# Altium PCB 拼版.PcbDoc (part 1 of 3)
Units mm, origin at the board's own origin, x right, y up, seen from the top; angles counter-clockwise.
Board outline 152.4 x 101.6 mm, 4 copper layers (Top Layer, Mid-Layer 1, Mid-Layer 2, Bottom Layer); 303 components, 0 nets, 1078 pads, 478 vias.
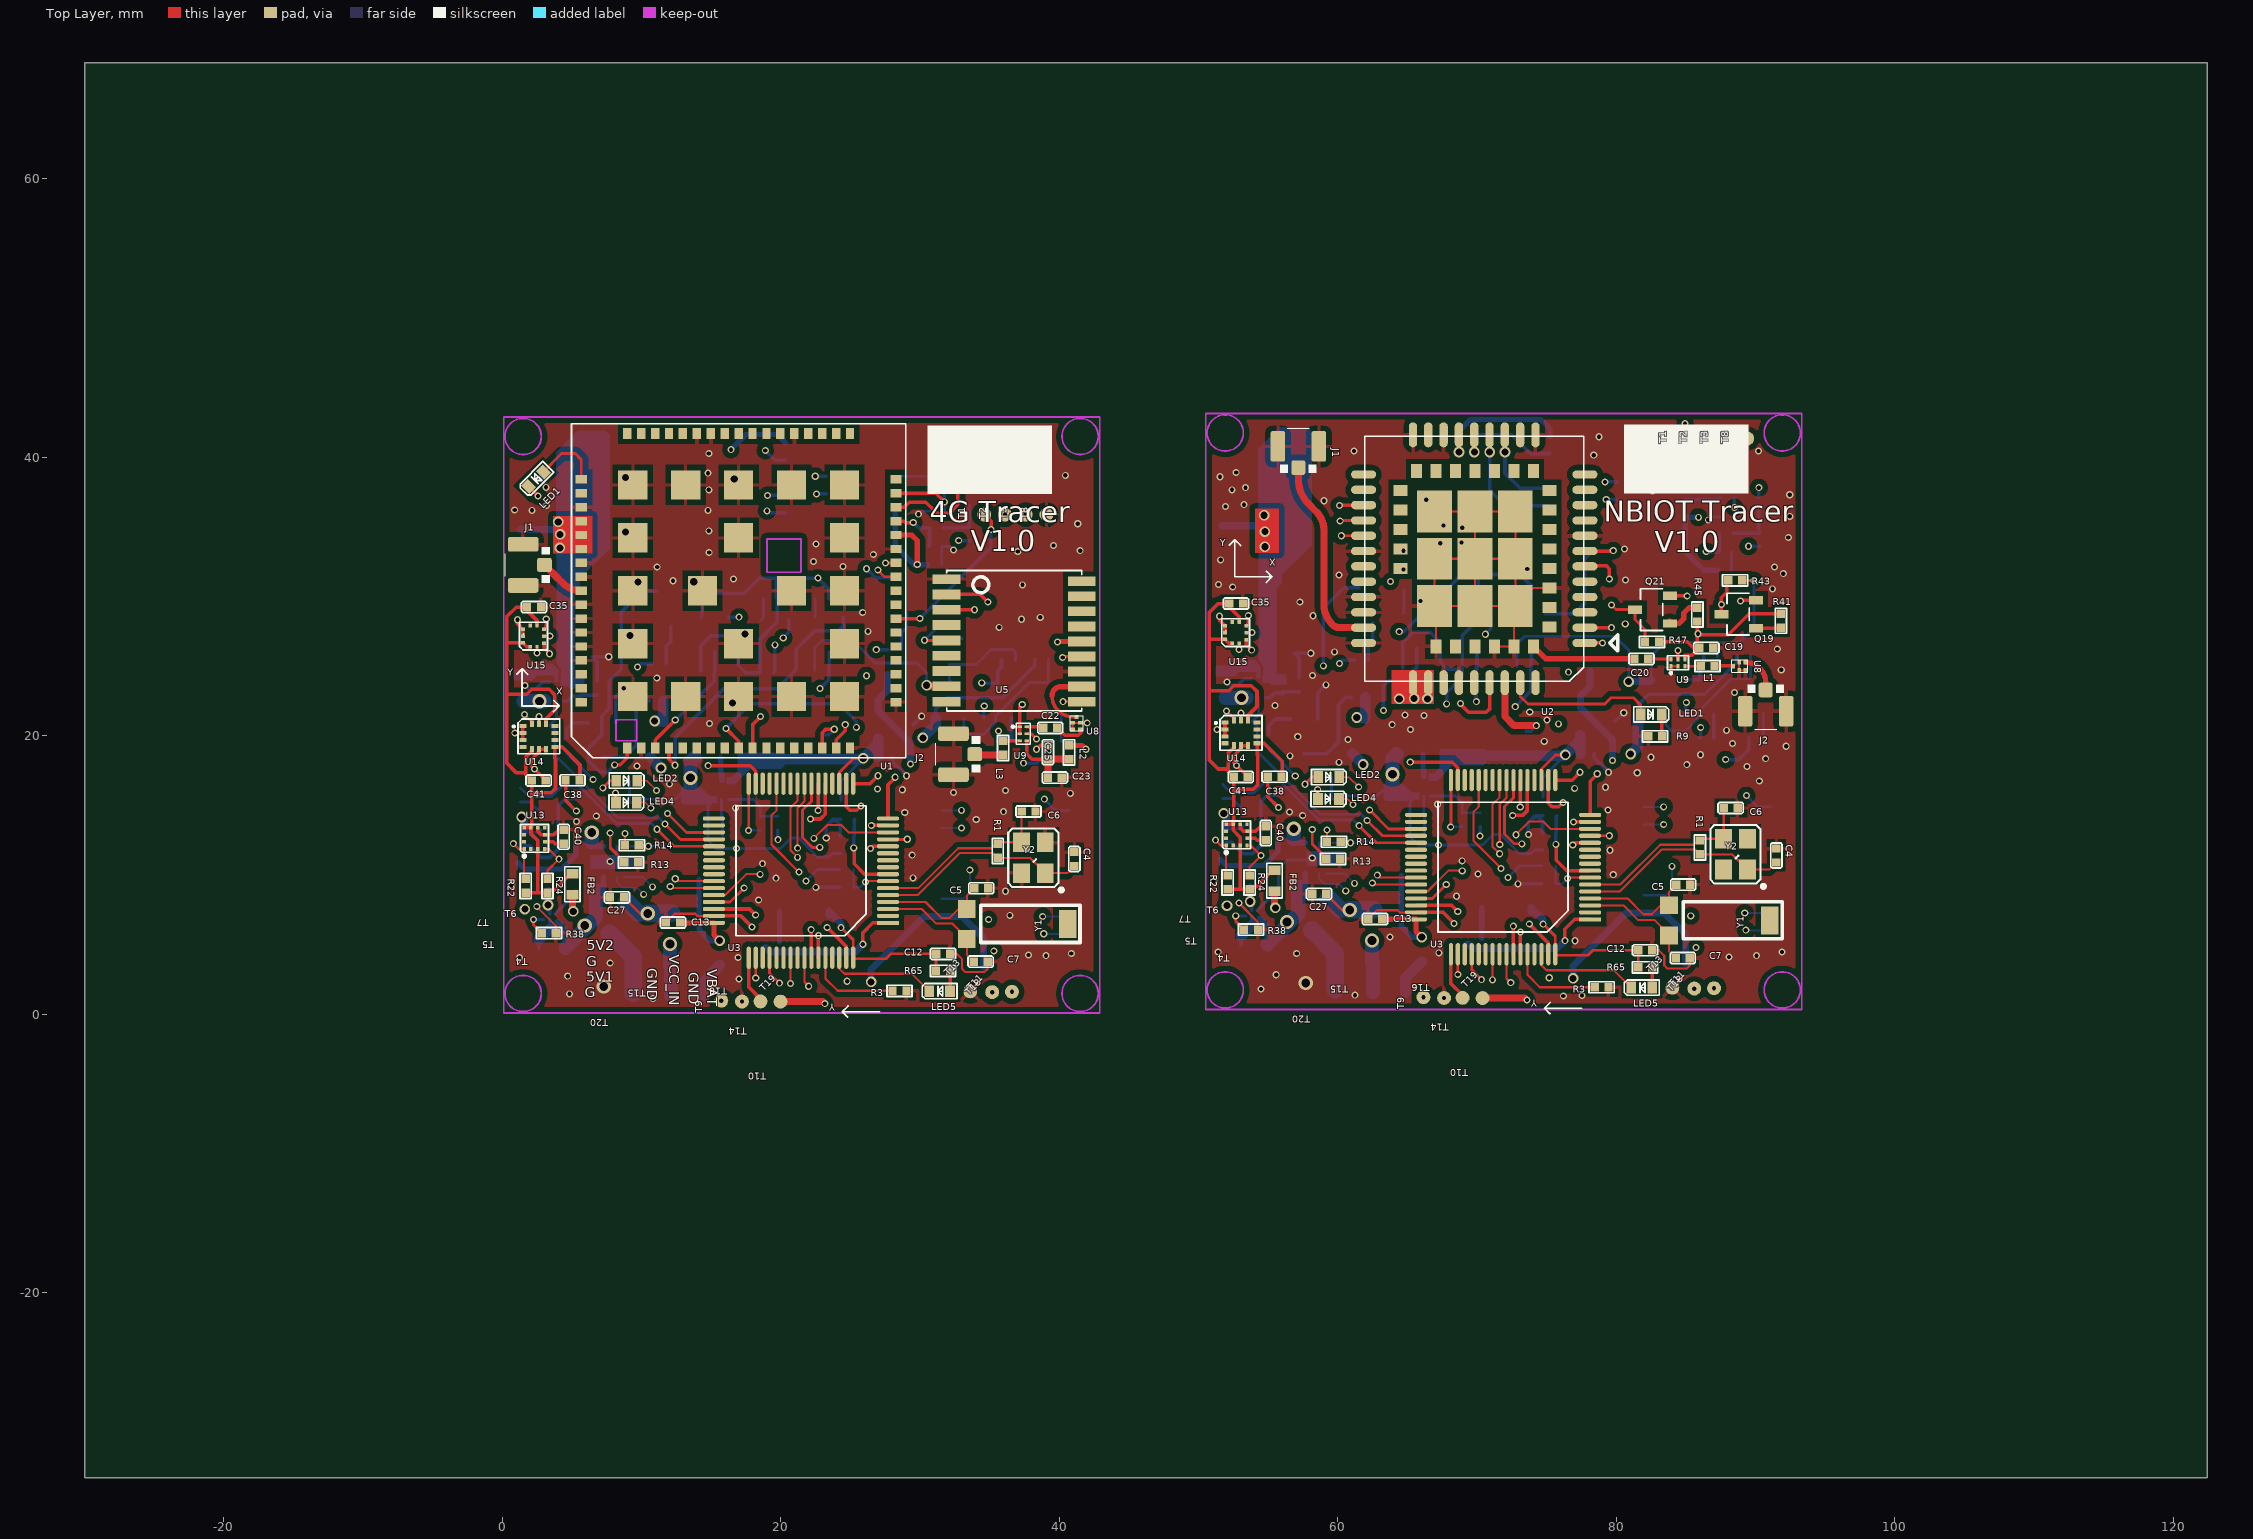
[diagram p0: Top Layer view]
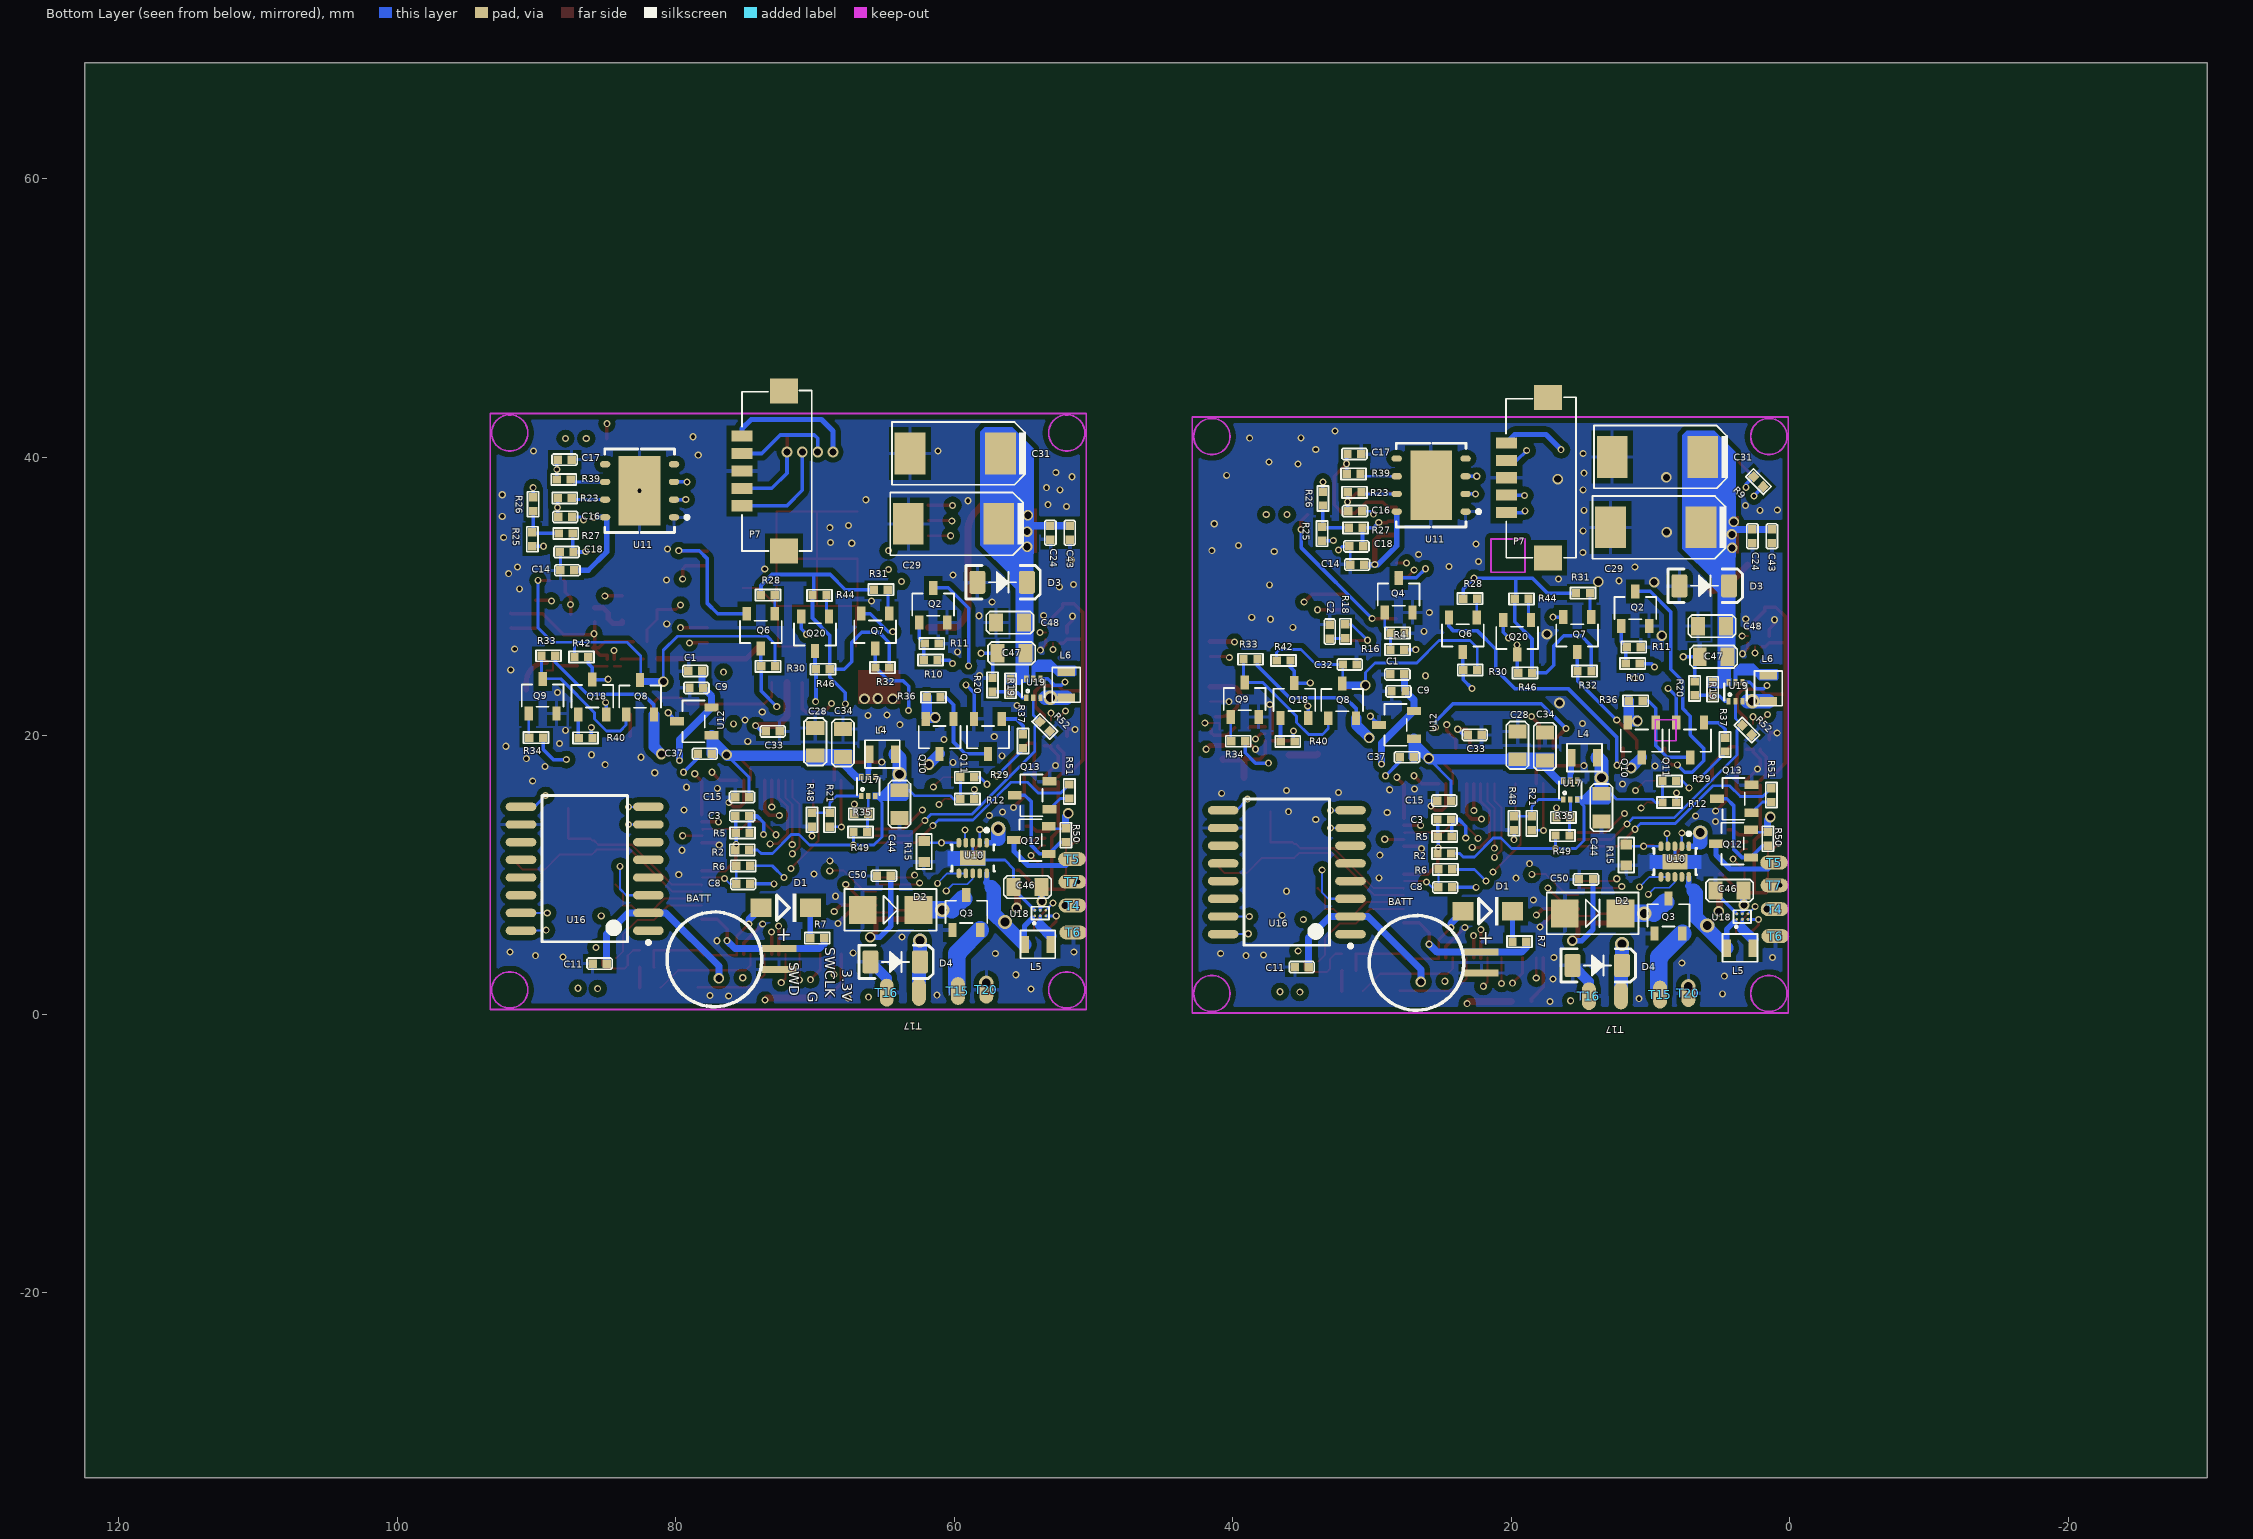
[diagram p1: Bottom Layer view, seen from below]
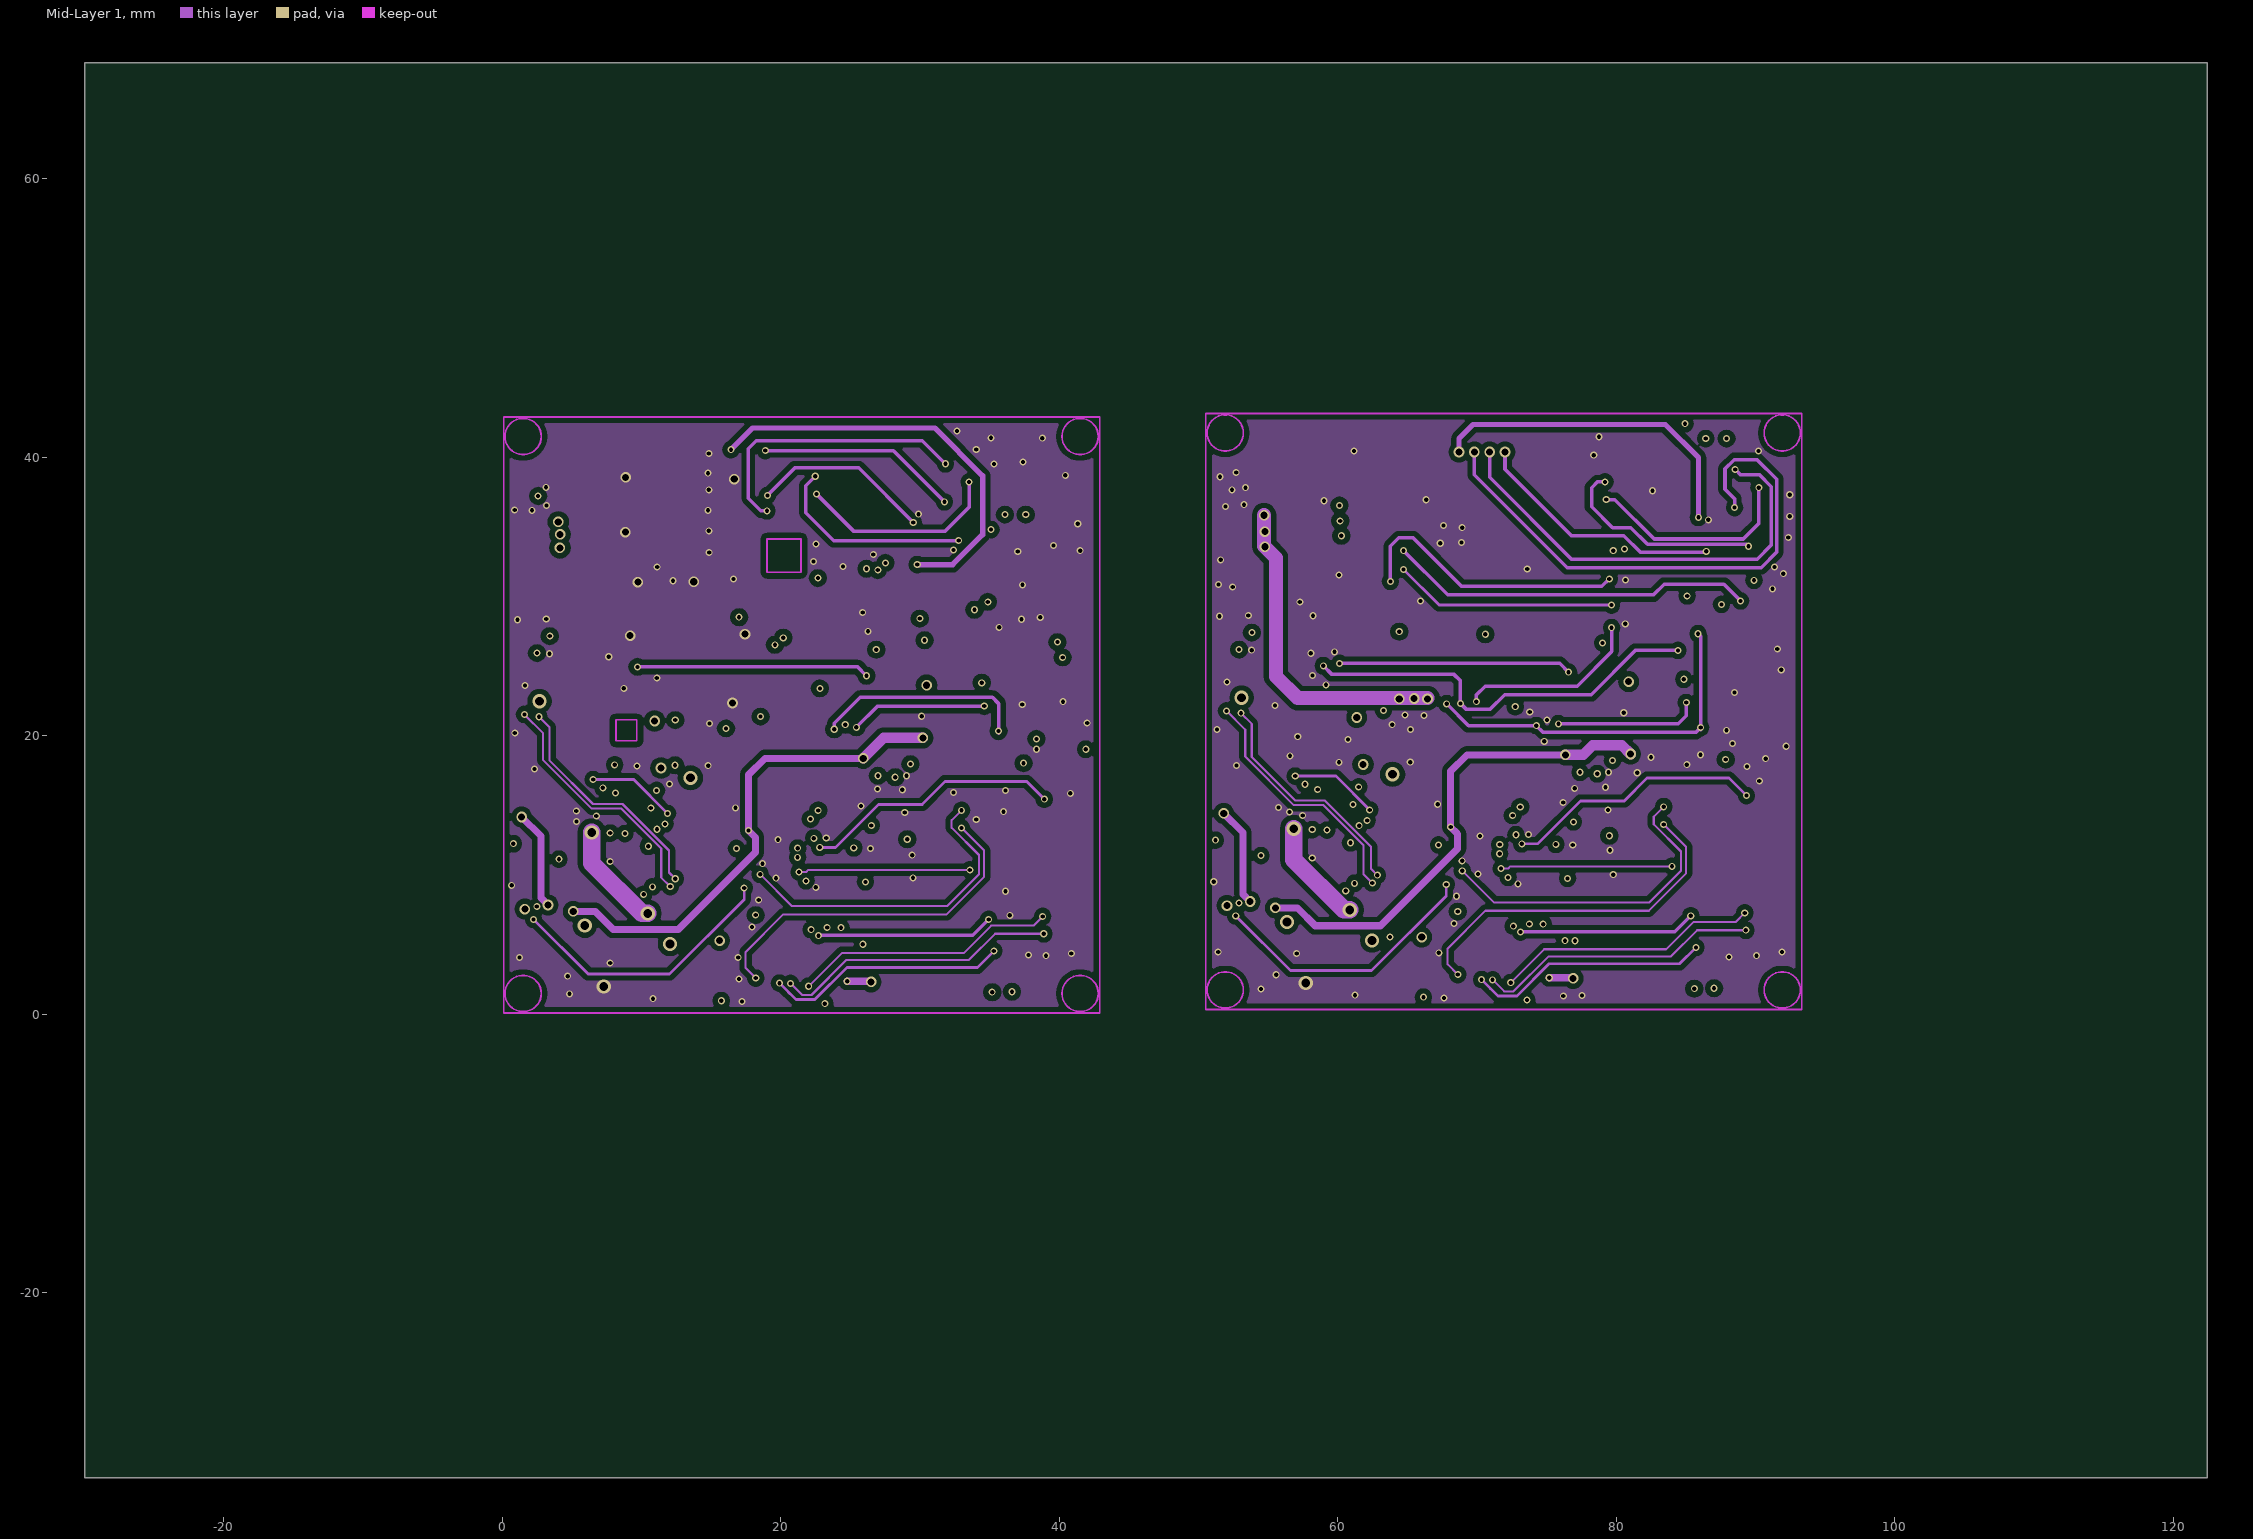
[diagram p2: Mid-Layer 1]
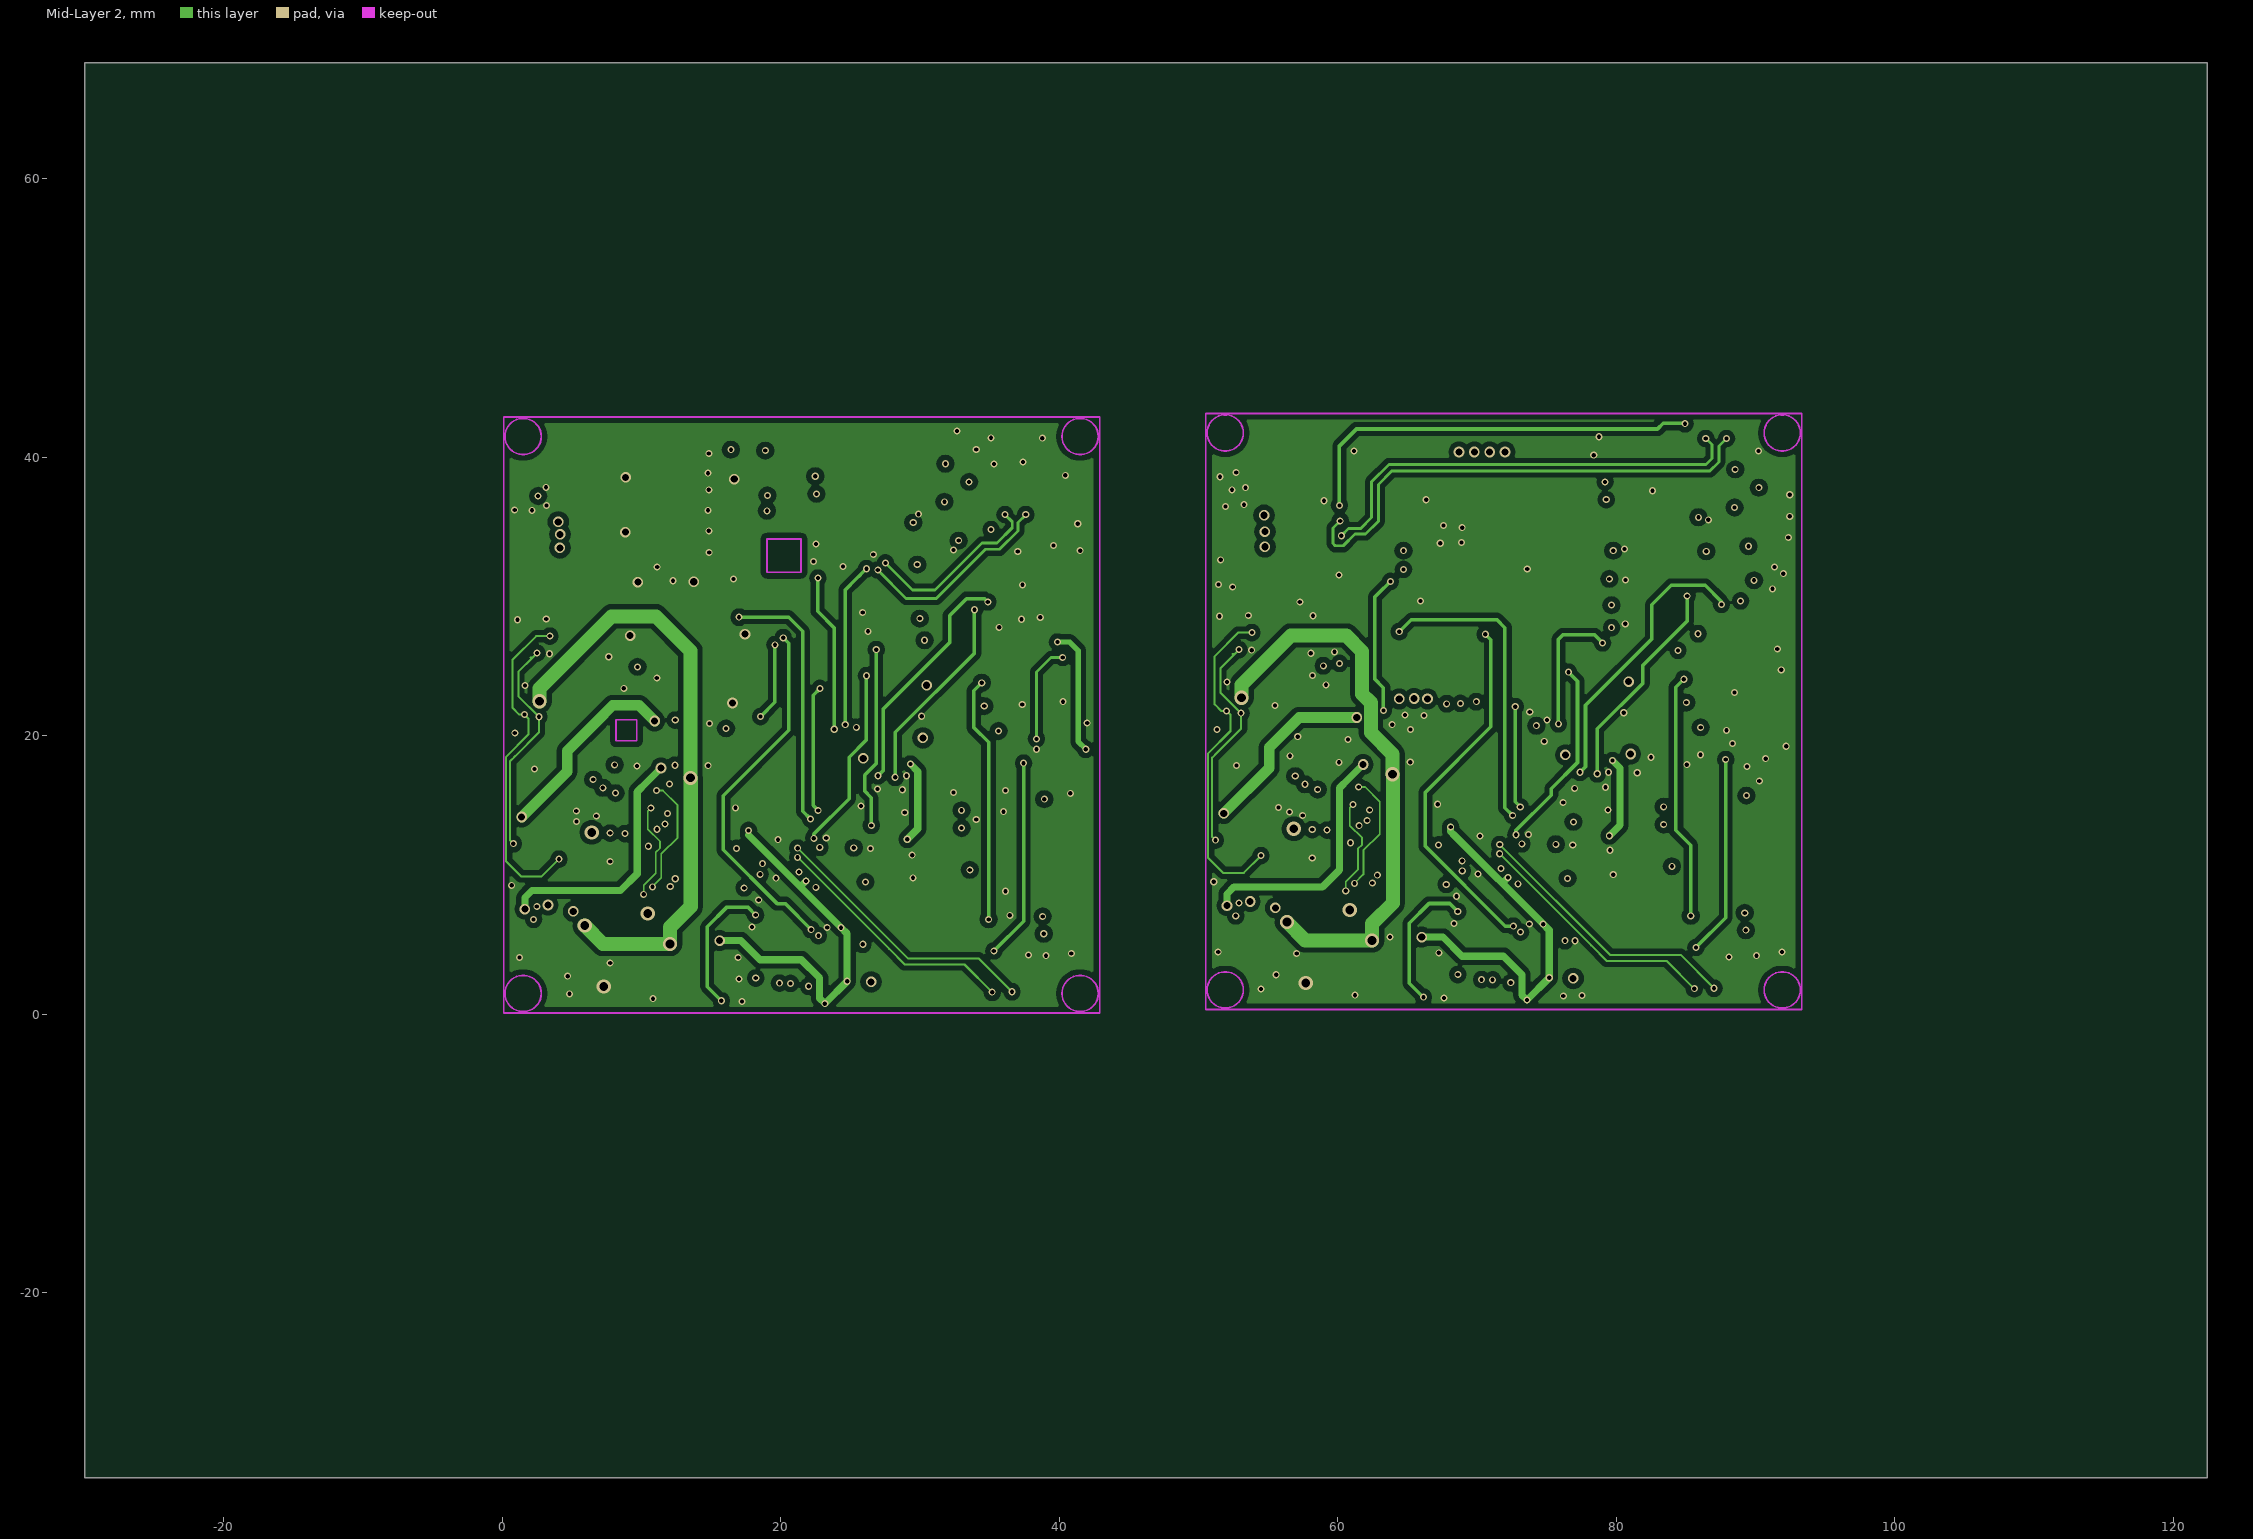
[diagram p3: Mid-Layer 2]

## Layer stack, top to bottom
Top Layer: signal copper 0.0356
Dielectric: core 0.32, FR-4, Dk 4.8
Mid-Layer 1: signal copper 0.0356
Dielectric: prepreg 0.32, FR-4, Dk 4.8
Mid-Layer 2: signal copper 0.0356
Dielectric: core 0.32, FR-4, Dk 4.8
Bottom Layer: signal copper 0.0356

## Board outline
-29.972,-33.274 122.428,-33.274 122.428,68.326 -29.972,68.326

## Design rules (kind name [scope] priority, off if disabled: settings)
Clearance [All] p1: gap=0.254
PolygonConnect [All] p1: connectstyle=Relief reliefconductorwidth=0.254 reliefentries=4 polygonreliefangle="90 Angle"
RoutingVias [All] p1: holewidth=0.711 width=1.27 viastyle="Through Hole" minholewidth=0.711 minwidth=1.27 maxholewidth=0.711 maxwidth=1.27
SilkscreenOverComponentPads [All] p1: minsilkscreentomaskgap=0.254
SolderMaskExpansion [All] p1: expansion=0.102
Width [All] p1: maxlimit=0.254 minlimit=0.254 preferedwidth=0.254
27 further rules are at their usual default settings.

## Components (designator, comment, footprint, x,y, rotation, side; value= is the part's Value field where it differs from the comment)
BATT "MS621FE" MS621FE 72.568,3.968 r180 bottom
BATT "MS621FE" MS621FE 22.149,3.714 r180 bottom
C1 "0.1uF/25V" 0402c 78.098,24.671 r0 bottom
C1 "0.1uF/25V" 0402c 27.679,24.417 r0 bottom
C2 "4.7uF/10V" 0402c 33.033,27.986 r270 bottom
C3 "0.1uF/25v" 0402c 75.718,14.248 r180 bottom
C3 "0.1uF/25v" 0402c 25.299,13.994 r180 bottom
C4 "22pF" 0402c 91.498,11.91 r270 top
C4 "22pF" 0402c 41.079,11.656 r270 top
C5 "6pF" 0402c 84.313,9.313 r0 top
C5 "6pF" 0402c 33.894,9.059 r0 top
C6 "22pF" 0402c 88.714,14.82 r180 top
C6 "22pF" 0402c 38.295,14.566 r180 top
C7 "6pF" 0402c 84.272,4.037 r0 top
C7 "6pF" 0402c 33.853,3.783 r0 top
C8 "0.1uF/25V" 0402C 74.654,9.374 r0 bottom
C8 "0.1uF/25V" 0402C 24.235,9.12 r0 bottom
C9 "0.1uF/25V" 0402C 79.014,23.449 r180 bottom
C9 "0.1uF/25V" 0402C 28.595,23.195 r180 bottom
C11 "0.1uF/25V" 0402C 85.963,3.64 r180 bottom
C11 "0.1uF/25V" 0402C 35.544,3.386 r180 bottom
C12 "0.1uF/25V" 0402C 82.573,4.602 r180 top
C12 "0.1uF/25V" 0402C 32.154,4.348 r180 top
C13 "0.1uF/25V" 0402C 62.179,6.847 r0 top
C13 "0.1uF/25V" 0402C 11.76,6.593 r0 top
C14 "0.1uF" 0402C 88.28,31.89 r180 bottom
C14 "0.1uF" 0402C 31.562,32.297 r180 bottom
C15 "0.1uF/25V" 0402C 75.733,15.602 r180 bottom
C15 "0.1uF/25V" 0402C 25.314,15.348 r180 bottom
C16 "10pF/NC" 0402C 87.433,35.726 r0 bottom
C16 "10pF/NC" 0402C 30.714,36.133 r0 bottom
C17 "10pF/NC" 0402C 87.476,39.838 r0 bottom
C17 "10pF/NC" 0402C 30.758,40.244 r0 bottom
C18 "10pF/NC" 0402C 88.341,33.202 r180 bottom
C18 "10pF/NC" 0402C 31.622,33.608 r180 bottom
C19 "0.1uF" 0402C 86.97,26.314 r180 top
C20 "36pF" 0402c 81.305,25.527 r0 top
C22 "36pF" 0402c 39.85,20.573 r180 top
C23 "4.7uF" 0402c 40.182,16.998 r180 top
C24 "10pF" 0402C 53.099,34.087 r90 bottom
C24 "10pF" 0402C 2.68,33.833 r90 bottom
C25 "0.1uF" 0402C 39.187,19.327 r270 top
C27 "1uF/25V" 0402C 59.16,8.655 r180 top
C27 "1uF/25V" 0402C 8.741,8.401 r180 top
C28 "22uF/10V" 0805C 69.98,18.575 r90 bottom
C28 "22uF/10V" 0805C 19.561,18.321 r90 bottom
C29 "1000uF" 7343 56.79,35.226 r0 bottom
C29 "1000uF" 7343 6.371,34.972 r0 bottom
C31 "1000uF" 7343 56.673,40.282 r0 bottom
C31 "1000uF" 7343 6.254,40.028 r0 bottom
C32 "10uF/10V" 0402C 31.096,25.125 r0 bottom
C33 "0.1uF/25V" 0402C 72.536,20.326 r0 bottom
C33 "0.1uF" 0402C 22.117,20.072 r0 bottom
C34 "22uF/10V" 0805C 67.996,18.492 r90 bottom
C34 "22uF/10V" 0805C 17.577,18.238 r90 bottom
C35 "0.1uF/25V" 0402C 53.197,29.5 r180 top
C35 "0.1uF/25V" 0402C 2.778,29.246 r180 top
C37 "0.1uF/25V" 0402c 77.415,18.716 r0 bottom
C37 "0.1uF/25V" 0402c 26.996,18.462 r0 bottom
C38 "0.1uF/25V" 0402C 54.963,17.065 r0 top
C38 "0.1uF/25V" 0402C 4.544,16.811 r0 top
C40 "22pF" 0402c 54.83,12.513 r90 top
C40 "22pF" 0402c 4.411,12.259 r90 top
C41 "0.1uF/25V" 0402C 53.532,17.051 r180 top
C41 "0.1uF/25V" 0402C 3.113,16.797 r180 top
C43 "33pF" 0402C 51.702,34.087 r90 bottom
C43 "33pF" 0402C 1.283,33.833 r90 bottom
C44 "22uF/10V" 0805C 63.939,16.095 r270 bottom
C44 "22uF/10V" 0805C 13.52,15.841 r270 bottom
C46 "22uF/10V" 0805C 53.736,9.145 r0 bottom
C46 "22uF/10V" 0805C 3.317,8.891 r0 bottom
C47 "22uF/10V" 0805C 54.881,25.933 r0 bottom
C47 "22uF/10V" 0805C 4.462,25.679 r0 bottom
C48 "22uF/10V" 0805C 54.999,28.128 r0 bottom
C48 "22uF/10V" 0805C 4.58,27.874 r0 bottom
C50 "0.1uF/25V" 0402C 65.548,9.951 r180 bottom
C50 "0.1uF/25V" 0402C 15.129,9.697 r180 bottom
D1 "1N4148" DIODE_SOP 73.887,7.658 r180 bottom
D1 "1N4148" DIODE_SOP 23.468,7.404 r180 bottom
D2 "SMAJ12CA" SMA 66.572,7.505 r180 bottom
D2 "SMAJ12CA" SMA 16.153,7.251 r180 bottom
D3 "DIODE_SCHOTTKY_0" LL-34(D1206) 56.561,31.028 r180 bottom
D3 "DIODE_SCHOTTKY_0" LL-34(D1206) 6.142,30.774 r180 bottom
D4 "DIODE_SCHOTTKY_0" LL-34(D1206) 64.244,3.767 r180 bottom
D4 "DIODE_SCHOTTKY_0" LL-34(D1206) 13.825,3.513 r180 bottom
FB2 "10R/1A" 0603R 55.456,8.848 r90 top
FB2 "10R/1A" 0603R 5.037,8.594 r90 top
J1 "IPEX" RF-UFL 57.167,40.787 r0 top
J1 "IPEX" RF-UFL 1.504,32.275 r90 top
J2 "IPEX" RF-UFL 90.729,21.768 r180 top
J2 "IPEX" RF-UFL 32.399,18.682 r90 top
L1 "LQW15A" 0402R 86.055,25.019 r0 top
L2 "27nH" 0402R 40.706,19.313 r270 top
L3 "LQW15A" 0402R 35.966,19.634 r270 top
L4 "SRP4020TA-1R0M" L2520 66.119,18.676 r180 bottom
L4 "SRP4020TA-1R0M" L2520 15.7,18.422 r180 bottom
L5 "SRP4020TA-2R2M" L2520 54.951,5.016 r180 bottom
L5 "SRP4020TA-2R2M" L2520 4.532,4.762 r180 bottom
L6 "SRP4020TA-1R0M" L2520 51.963,24.627 r270 bottom
L6 "SRP4020TA-1R0M" L2520 1.544,24.373 r270 bottom
LED1 "LED" 0603LED 81.763,21.539 r0 top
LED1 "LED" 0603LED 2.953,38.964 r225 top
LED2 "LED" 0603LED 58.606,17.035 r0 top
LED2 "LED" 0603LED 8.187,16.781 r0 top
LED4 "LED" 0603LED 58.583,15.465 r0 top
LED4 "LED" 0603LED 8.164,15.211 r0 top
LED5 "LED" 0603LED 82.58,1.918 r180 top
LED5 "LED" 0603LED 32.161,1.664 r180 top
P7 "Header 5" 5×1.25mmSMT 75.235,36.525 r90 bottom
P7 "Header 5" 5×1.25mmSMT 20.353,36.034 r90 bottom
Q2 "MMBT3904" SOT23-3 62.509,28.13 r270 bottom
Q2 "MMBT3904" SOT23-3 12.09,27.876 r270 bottom
Q3 "Si2369DS" sot23-3 60.126,6.064 r270 bottom
Q3 "Si2369DS" sot23-3 9.707,5.81 r270 bottom
Q4 "MMBT3904" SOT23-3 29.088,28.845 r270 bottom
Q6 "MMBT3904" SOT23-3 72.893,28.768 r90 bottom
Q6 "MMBT3904" SOT23-3 22.474,28.514 r90 bottom
Q7 "MMBT3904" SOT23-3 64.678,28.775 r90 bottom
Q7 "MMBT3904" SOT23-3 14.259,28.521 r90 bottom
Q8 "Si2369DS" sot23-3 83.562,21.52 r270 bottom
Q8 "Si2369DS" sot23-3 33.143,21.266 r270 bottom
Q9 "S8050" SOT23-3 90.56,21.596 r270 bottom
Q9 "S8050" SOT23-3 40.141,21.342 r270 bottom
Q10 "Si2369DS" sot23-3 60.052,21.211 r90 bottom
Q10 "Si2369DS" sot23-3 9.633,20.957 r90 bottom
Q11 "S8050" SOT23-3 56.575,21.211 r90 bottom
Q11 "S8050" SOT23-3 6.156,20.957 r90 bottom
Q12 "Si2369DS" sot23-3 53.213,11.517 r180 bottom
Q12 "Si2369DS" sot23-3 2.794,11.263 r180 bottom
Q13 "S8050" SOT23-3 53.155,14.733 r180 bottom
Q13 "S8050" SOT23-3 2.736,14.479 r180 bottom
Q18 "MMBT3904" SOT23-3 86.988,21.544 r270 bottom
Q18 "MMBT3904" SOT23-3 36.569,21.29 r270 bottom
Q19 "MMBT3904" SOT23-3 90.043,27.737 r0 top
Q20 "MMBT3904" SOT23-3 68.997,28.585 r90 bottom
Q20 "MMBT3904" SOT23-3 18.578,28.331 r90 bottom
Q21 "MMBT3904" SOT23-3 83.845,28.067 r0 top
R1 "1MR" 0402R 86.004,11.489 r90 top
R1 "1MR" 0402R 35.585,11.235 r90 top
R2 "10K/1%" 0402R 74.718,11.81 r0 bottom
R2 "10K/1%" 0402R 24.299,11.556 r0 bottom
R3 "100K" 0402R 78.446,1.945 r0 top
R3 "100K" 0402R 28.027,1.691 r0 top
R4 "47K" 0402R 28.662,27.4 r180 bottom
R5 "10K/1%" 0402R 75.702,13.029 r180 bottom
R5 "10K/1%" 0402R 25.283,12.775 r180 bottom
R6 "10K" 0402R 74.647,10.667 r0 bottom
R6 "10K" 0402R 24.228,10.413 r0 bottom
R7 "470" 0402R 70.331,5.474 r180 bottom
R7 "470" 0402R 19.912,5.22 r180 bottom
R9 "1K" 0402R 83.287,19.964 r180 top
R9 "1K" 0402R 1.893,37.903 r45 bottom
R10 "4.7K" 0402R 62.201,25.445 r180 bottom
R10 "4.7K" 0402R 11.782,25.191 r180 bottom
R11 "47K" 0402R 62.116,26.628 r180 bottom
R11 "47K" 0402R 11.697,26.374 r180 bottom
R12 "1K/1%" 0402R 59.558,15.465 r180 bottom
R12 "1K/1%" 0402R 9.139,15.211 r180 bottom
R13 "3.95K/1%" 0402R 59.167,11.166 r0 top
R13 "3.95K/1%" 0402R 8.748,10.912 r0 top
R14 "21.5k/1%" 0402R 60.224,12.398 r180 top
R14 "21.5k/1%" 0402R 9.805,12.144 r180 top
R15 "RTH103AT" 0603R 62.156,10.948 r90 bottom
R15 "RTH103AT" 0603R 11.737,10.694 r90 bottom
R16 "4.7K" 0402R 28.674,26.189 r180 bottom
R18 "10K" 0402R 31.914,28.004 r270 bottom
R19 "534K/1%" 0402R 55.959,24.097 r270 bottom
R19 "534K/1%" 0402R 5.54,23.843 r270 bottom
R20 "100K/1%" 0402R 57.248,24.16 r270 bottom
R20 "100K/1%" 0402R 6.829,23.906 r270 bottom
R21 "400K/1%" 0402R 68.943,13.469 r90 bottom
R21 "400K/1%" 0402R 18.524,13.215 r90 bottom
R22 "4.7K" 0402R 52.095,8.974 r90 top
R22 "4.7K" 0402R 1.676,8.72 r90 top
R23 "10R" 0402R 88.471,37.077 r180 bottom
R23 "10R" 0402R 31.752,37.483 r180 bottom
R24 "4.7K" 0402R 53.67,9.974 r270 top
R24 "4.7K" 0402R 3.251,9.72 r270 top
R25 "0R" 0402R 90.299,33.617 r90 bottom
R25 "0R" 0402R 33.58,34.023 r90 bottom
R26 "0R" 0402R 90.238,37.132 r270 bottom
R26 "0R" 0402R 33.52,37.538 r270 bottom
R27 "10R" 0402R 87.398,34.533 r0 bottom
R27 "10R" 0402R 30.68,34.94 r0 bottom
R28 "4.7K" 0402R 72.876,30.109 r0 bottom
R28 "4.7K" 0402R 22.457,29.855 r0 bottom
R29 "1K/1%" 0402R 59.558,17.015 r180 bottom
R29 "1K/1%" 0402R 9.139,16.761 r180 bottom
R30 "10K" 0402R 73.865,24.986 r180 bottom
R30 "10K" 0402R 23.446,24.732 r180 bottom
R31 "4.7K" 0402R 64.763,30.504 r0 bottom
R31 "4.7K" 0402R 14.344,30.25 r0 bottom
R32 "4.7K" 0402R 65.657,24.904 r180 bottom
R32 "4.7K" 0402R 15.238,24.65 r180 bottom
R33 "4K7" 0402R 88.642,25.753 r0 bottom
R33 "4K7" 0402R 38.223,25.499 r0 bottom
R34 "4K7" 0402R 90.528,19.868 r180 bottom
R34 "4K7" 0402R 40.109,19.614 r180 bottom
R35 "10K/1%" 0402R 67.173,14.402 r180 bottom
R35 "10K/1%" 0402R 16.754,14.148 r180 bottom
R36 "4K7" 0402R 61.983,22.775 r180 bottom
R36 "4K7" 0402R 11.564,22.521 r180 bottom
R37 "4K7" 0402R 55.056,20.127 r270 bottom
R37 "4K7" 0402R 4.637,19.873 r270 bottom
R38 "10K/1%" 0402R 54.27,6.083 r180 top
R38 "10K/1%" 0402R 3.851,5.829 r180 top
R39 "10R" 0402R 88.54,38.41 r180 bottom
R39 "10R" 0402R 31.822,38.817 r180 bottom
R40 "4.7K" 0402R 86.972,19.851 r180 bottom
R40 "4.7K" 0402R 36.553,19.597 r180 bottom
R41 "4.7K" 0402R 91.821,27.762 r90 top
R42 "10K" 0402R 86.27,25.665 r0 bottom
R42 "10K" 0402R 35.851,25.411 r0 bottom
R43 "10K" 0402R 88.036,31.166 r0 top
R44 "4.7K" 0402R 69.176,30.09 r0 bottom
R44 "4.7K" 0402R 18.757,29.836 r0 bottom
R45 "4.7K" 0402R 85.827,29.21 r270 top
R46 "4.7K" 0402R 69.927,24.782 r180 bottom
R46 "4.7K" 0402R 19.508,24.528 r180 bottom
R47 "4.7K" 0402R 82.067,26.746 r0 top
R48 "100K/1%" 0402R 70.218,13.48 r90 bottom
R48 "100K/1%" 0402R 19.799,13.226 r90 bottom
R49 "13K/1%" 0402R 67.236,13.093 r180 bottom
R49 "13K/1%" 0402R 16.817,12.839 r180 bottom
R50 "4K7" 0402R 51.987,13.361 r270 bottom
R50 "4K7" 0402R 1.568,13.107 r270 bottom
R51 "4K7" 0402R 51.736,15.503 r90 bottom
R51 "4K7" 0402R 1.317,15.249 r90 bottom
R52 "10K/1%" 0402R 53.135,20.318 r45 bottom
R52 "10K/1%" 0402R 2.716,20.064 r45 bottom
R65 "1K" 0402R 82.571,3.376 r180 top
R65 "1K" 0402R 32.152,3.122 r180 top
T1 "TPD" TPD 84.938,41.351 r90 top
T1 "TPD" TPD 34.61,35.891 r90 top
T2 "TPD" TPD 86.428,41.351 r90 top
T2 "TPD" TPD 36.1,35.891 r90 top
T3 "TPD" TPD 87.918,41.351 r90 top
T3 "TPD" TPD 37.59,35.891 r90 top
T4 "TPD" TP#1 51.504,7.808 r180 top
T4 "TPD" TP#1 1.085,7.554 r180 top
T5 "TPD" TP#1 51.538,11.151 r180 top
T5 "TPD" TP#1 1.119,10.897 r180 top
T6 "TPD" TP#1 51.45,5.878 r0 top
T6 "TPD" TP#1 1.031,5.624 r0 top
T7 "TPD" TP#1 51.515,9.521 r180 top
T7 "TPD" TP#1 1.096,9.267 r180 top
T8 "TPD" TPD 89.408,41.351 r90 top
T8 "TPD" TPD 39.08,35.891 r90 top
T9 "TPD" TPd 66.148,1.231 r90 top
T9 "TPD" TPd 15.729,0.977 r90 top
T10 "TPD" TPd 68.963,1.186 r270 top
T10 "TPD" TPd 18.544,0.932 r270 top
T11 "TPD" TPd 87.021,1.876 r135 top
T11 "TPD" TPd 36.602,1.622 r135 top
T13 "TPD" TPd 84.024,1.908 r135 top
T13 "TPD" TPd 33.605,1.654 r135 top
T14 "TPD" TPd 67.632,1.175 r270 top
T14 "TPD" TPd 17.213,0.921 r270 top
T15 "TPD" TP#1 59.731,1.675 r270 top
T15 "TPD" TP#1 9.312,1.421 r270 top
T16 "TPD" TP#1 64.844,1.558 r270 top
T16 "TPD" TP#1 14.425,1.304 r270 top
T17 "TPD" TP#2 62.539,1.609 r270 bottom
T17 "TPD" TP#2 12.12,1.355 r270 bottom
T18 "TPD" TPd 85.602,1.847 r135 top
T18 "TPD" TPd 35.183,1.593 r135 top
T19 "TPD" TPd 70.399,1.165 r135 top
T19 "TPD" TPd 19.98,0.911 r135 top
T20 "TPD" TP#1 57.696,1.78 r270 top
T20 "TPD" TP#1 7.277,1.526 r270 top
U1 "A7670" A7670 16.973,30.42 r90 top
U2 "SIM7080G" SIM868 77.749,26.67 r180 top
U3 "stm32l412r8t6" LQFP-64 78.12,6.821 r180 top
U3 "stm32l412r8t6" LQFP-64 27.701,6.567 r180 top
U5 "SIM868E/SIM68" SIM68MB 31.914,31.255 r0 top
U8 "SAFFB1G56KB0F0A" SAFFB1G56KB0F0A 88.392,24.994 r0 top
U8 "SAFFB1G56KB0F0A" SAFFB1G56KB0F0A 41.247,21.357 r270 top
U9 "AW5005DNR" AW5005 84.43,25.248 r90 top
U9 "AW5005DNR" AW5005 37.413,20.148 r0 top
U10 "bq24210" QFN50P200X300X80-10N 58.669,11.223 r270 bottom
U10 "bq24210" QFN50P200X300X80-10N 8.25,10.969 r270 bottom
U11 "SLI76CF3600P" QFN127P500X600X80-8N 82.596,37.599 r0 bottom
U11 "SLI76CF3600P" QFN127P500X600X80-8N 25.751,38.006 r0 bottom
U12 "REF3025AIDBZR" SOT23-3 77.415,20.037 r180 bottom
U12 "REF3025AIDBZR" SOT23-3 26.996,19.783 r180 bottom
U13 "LIS2MDL" LIS2MDL 52.731,12.887 r90 top
U13 "LIS2MDL" LIS2MDL 2.312,12.633 r90 top
U14 "LSM6DS3TR" LSM6DS3TR-C 53.052,20.213 r0 top
U14 "LSM6DS3TR" LSM6DS3TR-C 2.633,19.959 r0 top
U15 "BMP388" BMP388 52.664,27.418 r180 top
U15 "BMP388" BMP388 2.245,27.164 r180 top
U16 "MX25L51245GMI-10G" SOP127P1030X239-16N 86.535,10.459 r0 bottom
U16 "MX25L51245GMI-10G" SOP127P1030X239-16N 36.116,10.205 r0 bottom
U17 "TPS61023" SOT563-6 66.18,16.356 r180 bottom
U17 "TPS61023" SOT563-6 15.761,16.102 r180 bottom
U18 "TPS610997YFFR" TPS610997YFFR 53.821,7.274 r90 bottom
U18 "TPS610997YFFR" TPS610997YFFR 3.402,7.02 r90 bottom
U19 "TPS61023" SOT563-6 54.32,23.411 r180 bottom
U19 "TPS61023" SOT563-6 3.901,23.157 r180 bottom
Y1 "MC-146 32.768K/6pF" 32.768K 83.779,5.667 r90 top
Y1 "MC-146 32.768K/6pF" 32.768K 33.36,5.413 r90 top
Y2 "8MHz" OSCILLATOR-3.2X2.5 88.561,11.493 r90 top
Y2 "8MHz" OSCILLATOR-3.2X2.5 38.142,11.239 r90 top

## Footprints (in the part's own frame and the unit in brackets; to place one, negate y for a bottom-side part, rotate by r counter-clockwise, add the part's x,y. Pads: shape width x height; smd on the part's side, far side on the other; paste and mask are expansions set on the pad)
5×1.25mmSMT [mm]
  rect 1.8x2 smd: 0(-3.25,-3) 0(8.25,-3)
  rect 0.8x1.5 smd: 1(0,0) 2(1.25,0) 3(2.5,0) 4(3.75,0) 5(5,0)
  round 0.5 on Bottom Overlay: ""(-0.875,0.432)
  silkscreen extent -3.25,-5 8.28,0.02
32.768K [mm]
  rect 1.27x1.27 smd: 1(0,0) 2(2.159,0)
  rect 2x1.27 smd: 3(1.07,-7.239)
  silkscreen extent -0.25,-8.13 2.41,-1.02
0402c [mm]
  rect 0.6x0.6 smd: 1(0,0) 2(1,0)
  silkscreen extent -0.4,-0.4 1.4,0.4
0402C [mm]
  rect 0.6x0.6 smd: 1(0,0) 2(1,0)
  silkscreen extent -0.4,-0.4 1.4,0.4
0402R [mm]
  rect 0.6x0.6 smd: 1(0,0) 2(1,0)
  silkscreen extent -0.4,-0.4 1.4,0.4
0603LED [mm]
  rect 0.7x0.85 smd: 1(0,0) 2(1.5,0)
  silkscreen extent -0.5,-0.55 2,0.55
0603R [mm]
  rect 0.7x0.85 smd: 1(0,0) 2(1.5,0)
  silkscreen extent -0.5,-0.55 2,0.55
0805C [mm]
  rect 1x1.3 smd: 1(0,0) 2(2,0)
  silkscreen extent -0.7,-0.8 2.7,0.8
7343 [mm]
  rect 2.2x3 smd: 1(0,0) 2(6.5,0)
  silkscreen extent -1.75,-2.25 7.8,2.25
A7670 [mm]
  rect 0.8x0.6 smd: 1(-11.3,8) 2(-11.3,7) 3(-11.3,6) 4(-11.3,5) 5(-11.3,4) 6(-11.3,3) 7(-11.3,2) 8(-11.3,1) 9(-11.3,0) 10(-11.3,-1) 11(-11.3,-2) 12(-11.3,-3) 13(-11.3,-4) 14(-11.3,-5) 15(-11.3,-6) 16(-11.3,-7) 17(-11.3,-8) 35(11.3,-8) 36(11.3,-7) 37(11.3,-6) 38(11.3,-5) 39(11.3,-4) 40(11.3,-3) 41(11.3,-2) 42(11.3,-1) 43(11.3,0) 44(11.3,1) 45(11.3,2) 46(11.3,3) 47(11.3,4) 48(11.3,5) 49(11.303,6) 50(11.3,7) 51(11.3,8)
  rect 0.6x0.8 smd: 18(-8,-11.3) 19(-7,-11.3) 20(-6,-11.3) 21(-5,-11.3) 22(-4,-11.3) 23(-3,-11.3) 24(-2,-11.3) 25(-1,-11.3) 26(0,-11.3) 27(1,-11.3) 28(2,-11.3) 29(3,-11.3) 30(4,-11.3) 31(5,-11.3) 32(6,-11.3) 33(7,-11.3) 34(8,-11.3) 52(8,11.3) 53(7,11.3) 54(6,11.3) 55(5,11.3) 56(4,11.3) 57(3,11.3) 58(2,11.3) 59(1,11.3) 60(0,11.3) 61(-1,11.3) 62(-2,11.3) 63(-3,11.3) 64(-4,11.3) 65(-5,11.3) 66(-6,11.3) 67(-7,11.3) 68(-8,11.3)
  rect 2.1x2.1 smd: 69(-7.6,7.6) 70(-7.6,3.8) 71(-7.6,0) 72(-7.6,-3.8) 73(-7.6,-7.6) 74(-3.8,-7.6) 75(0,-7.6) 76(3.8,-7.6) 77(7.6,-7.6) 78(7.6,-3.8) 79(7.6,0) 80(7.6,3.8) 81(7.6,7.6) 82(3.8,7.6) 83(0,7.6) 84(-3.8,7.6) 85(-3.8,0) 86(0,-3.8) 87(3.8,0) 88(0,2.591)
  Keep-Out Layer lines w0.127: 1.321,-2.045 3.721,-2.045 ; 1.321,-2.07 1.321,-4.47 3.721,-4.47 3.721,-2.07 ; -10.77,8.814 -10.77,7.314 -9.27,7.314 -9.27,8.814 -10.77,8.814
  silkscreen extent -12,-12 12,12
AW5005 [mm]
  rect 0.35x0.2 smd: 1(-0.25,0.5) 2(-0.25,0) 3(-0.25,-0.5) 4(0.25,-0.5) 5(0.25,0) 6(0.25,0.5)
  silkscreen extent -0.77,-0.75 0.5,0.75
BMP388 [mm]
  rect 0.25x0.275 smd: 1(0.25,0.763) 2(-0.25,0.763) 6(-0.25,-0.763) 7(0.25,-0.763)
  rect 0.275x0.25 smd: 3(-0.762,0.5) 4(-0.762,0) 5(-0.762,-0.5) 8(0.763,-0.5) 9(0.763,0) 10(0.763,0.483)
  silkscreen extent -1,-1 1,1
DIODE_SOP [mm]
  rect 1.5x1.3 smd: 1(0,0) 2(3.556,0)
  silkscreen extent 1.14,-1.02 2.56,1.02
L2520 [mm]
  rect 0.65x1.25 smd: 1(0,0) 2(1.9,0)
  silkscreen extent -0.29,-0.99 2.21,1.01
LIS2MDL [mm]
  rect 0.275x0.25 smd: 1(-0.763,0.75) 2(-0.763,0.25) 3(-0.763,-0.25) 4(-0.763,-0.75) 7(0.763,-0.75) 8(0.763,-0.25) 9(0.763,0.25) 10(0.763,0.75)
  rect 0.25x0.275 smd: 5(-0.25,-0.763) 6(0.25,-0.763) 11(0.25,0.762) 12(-0.25,0.762)
  silkscreen extent -1.35,-1 1,1
LL-34(D1206) [mil]
  rrect25% 45x65 smd: 1(-70,0) 2(70,0)
  silkscreen extent -102,-47 108,47, body extent -70,-28 68,30, height 56
LQFP-64 [mm]
  rect 1.6x0.3 smd: 1(0,0)
  oval 1.6x0.3 smd: 2(0,-0.5) 3(0,-1) 4(0,-1.5) 5(0,-2) 6(0,-2.5) 7(0,-3) 8(0,-3.5) 9(0,-4) 10(0,-4.5) 11(0,-5) 12(0,-5.5) 13(0,-6) 14(0,-6.5) 15(0,-7) 16(0,-7.5) 33(12.5,-7.5) 34(12.5,-7) 35(12.5,-6.5) 36(12.5,-6) 37(12.5,-5.5) 38(12.5,-5) 39(12.5,-4.5) 40(12.5,-4) 41(12.5,-3.5) 42(12.5,-3) 43(12.5,-2.5) 44(12.5,-2) 45(12.5,-1.5) 46(12.5,-1) 47(12.5,-0.5) 48(12.5,0)
  oval 0.3x1.6 smd: 17(2.5,-10) 18(3,-10) 19(3.5,-10) 20(4,-10) 21(4.5,-10) 22(5,-10) 23(5.5,-10) 24(6,-10) 25(6.5,-10) 26(7,-10) 27(7.5,-10) 28(8,-10) 29(8.5,-10) 30(9,-10) 31(9.5,-10) 32(10,-10) 49(10,2.5) 50(9.5,2.5) 51(9,2.5) 52(8.5,2.5) 53(8,2.5) 54(7.5,2.5) 55(7,2.5) 56(6.5,2.5) 57(6,2.5) 58(5.5,2.5) 59(5,2.5) 60(4.5,2.5) 61(4,2.5) 62(3.5,2.5) 63(3,2.5) 64(2.5,2.5)
  silkscreen extent 1.59,-8.41 10.91,0.91
LSM6DS3TR-C [mm]
  rect 0.48x0.3 smd: 1(-1.15,0.75) 2(-1.15,0.25) 3(-1.15,-0.25) 4(-1.15,-0.75) 8(1.15,-0.75) 9(1.15,-0.25) 10(1.15,0.25) 11(1.15,0.75)
  rect 0.3x0.48 smd: 5(-0.5,-0.91) 6(0,-0.91) 7(0.5,-0.91) 12(0.5,0.91) 13(0,0.91) 14(-0.5,0.91)
  silkscreen extent -1.83,-1.25 1.5,1.25
MS621FE [mm]
  rect 2.5x0.5 smd: 1(0,-0.749) 2(0,0.749)
  silkscreen extent -8.05,-3.41 -1.25,3.39
OSCILLATOR-3.2X2.5 [mil] "OSCILLATOR-3.2X2.5"
  rect 56x48 smd: 1(-43.31,-33.46) 2(44,-33.46) 3(44,34) 4(-43.31,34)
  silkscreen extent -95,-83 83,71
QFN50P200X300X80-10N [mm] "QFN, 10-Leads, Body 2.9x1.9mm (max), Pitch 0.50mm, IPC Medium Density"
  oval 0.7x0.35 smd: 1(-1.1,1) 2(-1.1,0.5) 3(-1.1,0) 4(-1.1,-0.5) 5(-1.1,-1) 6(1.1,-1) 7(1.1,-0.5) 8(1.1,0) 9(1.1,0.5) 10(1.1,1)
  rect 1.1x1.8 smd: 11(0,0)
  silkscreen extent -2.12,-1.58 0.95,1.58, body extent -0.95,-1.45 0.95,1.45, height 0.8
QFN127P500X600X80-8N [mm] "QFN, 8-Leads, Body 6.0x5.0mm (max), Pitch 1.27mm, IPC Medium Density"
  oval 0.75x0.45 smd: 1(-2.475,1.905) 2(-2.475,0.635) 3(-2.475,-0.635) 4(-2.475,-1.905) 5(2.475,-1.905) 6(2.475,-0.635) 7(2.475,0.635) 8(2.475,1.905)
  rect 3x5 smd: 9(0,0)
  silkscreen extent -3.52,-3 2.5,3
RF-UFL [mm]
  rrect30% 1x1.05 smd: 1(0,-1.525)
  rrect30% 1.05x2.2 smd: 2(-1.475,0) 2(1.475,0)
  silkscreen extent -1.3,-1.93 1.3,1.3, body extent -1.7,-1.55 1.7,1.55, height 1.25
SAFFB1G56KB0F0A [mm]
  rect 0.3x0.3 smd: 1(0,0)
  rect 0.25x0.35 smd: 2(0.425,-0.287) 5(0.425,0.288)
  rect 0.3x0.35 smd: 3(0.9,-0.287) 4(0.9,0.288)
  silkscreen extent -0.1,-0.44 1,0.46
SIM68MB [mm]
  rect 2x0.7 smd: 1(0,0) 2(0,-1.1) 3(0,-2.2) 4(0,-3.3) 5(0,-4.4) 6(0,-5.5) 7(0,-6.6) 8(0,-7.7) 9(0,-8.8) 10(9.7,-8.8) 11(9.7,-7.719) 12(9.7,-6.638) 13(9.7,-5.557) 14(9.7,-4.476) 15(9.7,-3.395) 16(9.7,-2.314) 17(9.7,-1.233) 18(9.7,-0.152)
  silkscreen extent 0,-9.47 9.7,0.63
SIM868 [mm]
  oval 1.8x0.6 smd: 1(0,0) 2(0,-1.1) 3(0,-2.2) 4(0,-3.3) 5(0,-4.4) 6(0,-5.5) 7(0,-6.6) 8(0,-7.7) 9(0,-8.8) 10(0,-9.9) 11(0,-11) 12(0,-12.1) 22(15.9,-12.1) 23(15.9,-11) 24(15.9,-9.9) 25(15.9,-8.8) 26(15.9,-7.7) 27(15.9,-6.6) 28(15.9,-5.5) 29(15.9,-4.4) 30(15.9,-3.3) 31(15.9,-2.2) 32(15.9,-1.1) 33(15.9,0)
  oval 0.6x1.8 smd: 13(3.55,-14.95) 14(4.65,-14.95) 15(5.75,-14.95) 16(6.85,-14.95) 17(7.95,-14.95) 18(9.05,-14.95) 19(10.15,-14.95) 20(11.25,-14.95) 21(12.35,-14.95) 34(12.35,2.85) 35(11.25,2.85) 36(10.15,2.85) 37(9.05,2.85) 38(7.95,2.85) 39(6.85,2.85) 40(5.75,2.85) 41(4.65,2.85) 42(3.55,2.85)
  rect 1x0.8 smd: 43(2.549,-1.159) 44(2.549,-2.559) 45(2.549,-3.959) 46(2.549,-5.359) 47(2.549,-6.759) 48(2.549,-8.159) 49(2.549,-9.559) 50(2.549,-10.959) 58(13.251,-10.959) 59(13.251,-9.559) 60(13.251,-8.159) 61(13.251,-6.759) 62(13.251,-5.359)
  rect 0.8x1 smd: 51(3.7,-12.359) 52(5.1,-12.359) 53(6.5,-12.359) 54(7.9,-12.359) 55(9.3,-12.359) 56(10.7,-12.359) 57(12.1,-12.359) 63(10.7,0.25) 64(9.3,0.25) 65(7.9,0.25) 66(6.5,0.25) 67(5.1,0.25) 68(3.7,0.25)
  rect 2.5x3 smd: 69(5,-2.65) 70(5,-6.05) 71(5,-9.45) 72(7.9,-9.45) 73(10.8,-9.45) 74(10.8,-6.05) 75(10.8,-2.65) 76(7.9,-2.65) 77(7.9,-6.05)
  silkscreen extent -2.35,-14.85 15.8,2.75
SMA [mm]
  rect 2x2 smd: 1(0,0) 2(4,0)
  silkscreen extent -1.3,-1.5 5.3,1.5
SOP127P1030X239-16N [mm] "SOP, 16-Leads, Body 10.5x7.6mm (max), Pitch 1.27mm, IPC Medium Density"
  oval 2.2x0.6 smd: 1(-4.575,4.445) 2(-4.575,3.175) 3(-4.575,1.905) 4(-4.575,0.635) 5(-4.575,-0.635) 6(-4.575,-1.905) 7(-4.575,-3.175) 8(-4.575,-4.445) 9(4.575,-4.445) 10(4.575,-3.175) 11(4.575,-1.905) 12(4.575,-0.635) 13(4.575,0.635) 14(4.575,1.905) 15(4.575,3.175) 16(4.575,4.445)
  silkscreen extent -4.7,-5.25 3.07,5.42, body extent -3.8,-5.25 3.8,5.25, height 2.39
SOT23-3 [mm]
  rect 1x0.6 smd: 1(0,0) 2(0,2) 3(-2.5,1)
  silkscreen extent -2.1,-0.5 -0.5,2.5
sot23-3 [mm]
  rect 1x0.6 smd: 1(0,0) 2(0,2) 3(-2.5,1)
  silkscreen extent -2.1,-0.5 -0.5,2.5
SOT563-6 [mil] "SOT563-6"
  rect 12x18 smd: 1(-19.69,-26.57) 2(0,-26.57) 3(20,-26.57) 4(20,27) 5(0,27) 6(-19.69,27)
  silkscreen extent -31,-24 32,24
TP#1 [mm]
  oval 2x1 smd far side: 1(0,0)
TP#2 [mm]
  oval 2x1 smd: 1(0,0)
TPD [mm]
  round 1 smd: 1(0,0)
TPd [mm]
  round 1 smd: 1(0,0)
TPS610997YFFR [mm]
  round 0.2 smd: A1(-0.2,0.4) A2(0.2,0.4) B1(-0.2,0) B2(0.2,0) C1(-0.2,-0.4) C2(0.2,-0.4)
  silkscreen extent -0.77,-0.63 0.46,0.63

## Part data
BATT BATT: library part SBatery
C1 C1 C2 C20 C22 C23 C37 C37: library part Cap, "Capacitor"
C3 C3 C4 C4 C5 C5 C6 C6 C7 C7 C8 C8 C9 C9 C11 C11 C12 C12 C13 C13 C14 C14 C15 C15 C16 C16 C17 C17 C18 C18 C19 C24 C24 C25 C27 C27 C28 C28 C32 C33 C33 C34 C34 C35 C35 C38 C38 C40 C40 C41 C41 C43 C43 C44 C44 C46 C46 C47 C47 C48 C48 C50 C50: library part CAP, "Capacitor"
C29 C29 C31 C31: library part "Cap Pol3", "Polarized Capacitor (Surface Mount)"
D1 D1: library part D
D2 D2: library part DIODE_SCHOTTKY_0
FB2 FB2: library part INDUCTOR1
J1 J1 J2 J2: library part ANT
L1 L2 L3 L4 L4 L5 L5 L6 L6: library part INDUCTOR_1
P7 P7: "Header, 5-Pin"
Q2 Q2 Q4 Q9 Q9 Q11 Q11 Q13 Q13: library part 2N1069_1
Q3 Q3 Q8 Q8 Q10 Q10 Q12 Q12: library part NCE4060K, "NMOSFET"
Q6 Q6 Q7 Q7 Q18 Q18 Q19 Q20 Q20 Q21: library part NPN
R1 R1: library part Res3, "Resistor"
R2 R2 R4 R5 R5 R9 R9 R10 R10 R11 R11 R12 R12 R13 R13 R14 R14 R15 R15 R16 R18 R19 R19 R20 R20 R21 R21 R22 R22 R23 R23 R24 R24 R25 R25 R26 R26 R27 R27 R28 R28 R29 R29 R30 R30 R31 R31 R32 R32 R33 R33 R34 R34 R35 R35 R36 R36 R37 R37 R38 R38 R39 R39 R40 R40 R41 R42 R42 R43 R44 R44 R45 R46 R46 R47 R48 R48 R49 R49 R50 R50 R51 R51 R52 R52 R65 R65: library part RES1
R3 R3 R6 R6 R7 R7: library part Res2, "Resistor"
U2: library part SIM868E/SIM868
U3 U3: library part STM32L100R8T6, "ARM Cortex-M3 32-bit MCU, 64 KB Flash, 8 KB Internal RAM, 51 I/Os, 64-pin LQFP, -40 to 85 degC, Tray"
U5: library part SIM68MB
U8 U8: library part SAFFB1G56KBOFA
U10 U10: library part bq2410
U12 U12: library part REF3012
Y1 Y1 Y2 Y2: library part XTAL, "Crystal Oscillator"

## Via types
v1: diameter 0.508, hole 0.305, Top Layer to Bottom Layer, tented both sides, 421 vias
v2: diameter 0.762, hole 0.508, Top Layer to Bottom Layer, tented both sides, 43 vias
v3: diameter 1.016, hole 0.635, Top Layer to Bottom Layer, tented both sides, 14 vias

## Nets (pads, with @x,y where several pads share a name; then routed paths per layer and width w, separated by ;. In a path a pad name is that pad's centre, name@x,y a point inside that pad or via, vN(x,y) a via of type N, cw(c..) or ccw(c..) an arc to the next point about the centre after c; other vN are vias at no path point)
pads on no net: BATT.1 BATT.2 C1.1 C1.2 C2.1 C2.2 C3.1 C3.2 C4.1 C4.2 C5.1 C5.2 C6.1 C6.2 C7.1 C7.2 C8.1 C8.2 C9.1 C9.2 C11.1 C11.2 C12.1 C12.2 C13.1 C13.2 C14.1 C14.2 C15.1 C15.2 C16.1 C16.2 C17.1 C17.2 C18.1 C18.2 C19.1 C19.2 C20.1 C20.2 C22.1 C22.2 C23.1 C23.2 C24.1 C24.2 C25.1 C25.2 C27.1 C27.2 C28.1 C28.2 C29.1 C29.2 C31.1 C31.2 C32.1 C32.2 C33.1 C33.2 C34.1 C34.2 C35.1 C35.2 C37.1 C37.2 C38.1 C38.2 C40.1 C40.2 C41.1 C41.2 C43.1 C43.2 C44.1 C44.2 C46.1 C46.2 C47.1 C47.2 C48.1 C48.2 C50.1 C50.2 D1.1 D1.2 D2.1 D2.2 D3.1 D3.2 D4.1 D4.2 FB2.1 FB2.2 J1.1 J1.2 J2.1 J2.2 L1.1 L1.2 L2.1 L2.2 L3.1 L3.2 L4.1 L4.2 L5.1 L5.2 L6.1 L6.2 LED1.1 LED1.2 LED2.1 LED2.2 LED4.1 LED4.2 LED5.1 LED5.2 P7. P7.0 P7.1 P7.2 P7.3 P7.4 P7.5 Q2.1 Q2.2 Q2.3 Q3.1 Q3.2 Q3.3 Q4.1 Q4.2 Q4.3 Q6.1 Q6.2 Q6.3 Q7.1 Q7.2 Q7.3 Q8.1 Q8.2 Q8.3 Q9.1 Q9.2 Q9.3 Q10.1 Q10.2 Q10.3 Q11.1 Q11.2 Q11.3 Q12.1 Q12.2 Q12.3 Q13.1 Q13.2 Q13.3 Q18.1 Q18.2 Q18.3 Q19.1 Q19.2 Q19.3 Q20.1 Q20.2 Q20.3 Q21.1 Q21.2 Q21.3 R1.1 R1.2 R2.1 R2.2 R3.1 R3.2 R4.1 R4.2 R5.1 R5.2 R6.1 R6.2 R7.1 R7.2 R9.1 R9.2 R10.1 R10.2 R11.1 R11.2 R12.1 R12.2 R13.1 R13.2 R14.1 R14.2 R15.1 R15.2 R16.1 R16.2 R18.1 R18.2 R19.1 R19.2 R20.1 R20.2 R21.1 R21.2 R22.1 R22.2 R23.1 R23.2 R24.1 R24.2 R25.1 R25.2 R26.1 R26.2 R27.1 R27.2 R28.1 R28.2 R29.1 R29.2 R30.1 R30.2 R31.1 R31.2 R32.1 R32.2 R33.1 R33.2 R34.1 R34.2 R35.1 R35.2 R36.1 R36.2 R37.1 R37.2 R38.1 R38.2 R39.1 R39.2 R40.1 R40.2 R41.1 R41.2 R42.1 R42.2 R43.1 R43.2 R44.1 R44.2 R45.1 R45.2 R46.1 R46.2 R47.1 R47.2 R48.1 R48.2 R49.1 R49.2 R50.1 R50.2 R51.1 R51.2 R52.1 R52.2 R65.1 R65.2 T1.1 T2.1 T3.1 T4.1 T5.1 T6.1 T7.1 T8.1 T9.1 T10.1 T11.1 T13.1 T14.1 T15.1 T16.1 T17.1 T18.1 T19.1 T20.1 U1.1 U1.2 U1.3 U1.4 U1.5 U1.6 U1.7 U1.8 U1.9 U1.10 U1.11 U1.12 U1.13 U1.14 U1.15 U1.16 U1.17 U1.18 U1.19 U1.20 U1.21 U1.22 U1.23 U1.24 U1.25 U1.26 U1.27 U1.28 U1.29 U1.30 U1.31 U1.32 U1.33 U1.34 U1.35 U1.36 U1.37 U1.38 U1.39 U1.40 U1.41 U1.42 U1.43 U1.44 U1.45 U1.46 U1.47 U1.48 U1.49 U1.50 U1.51 U1.52 U1.53 U1.54 U1.55 U1.56 U1.57 U1.58 U1.59 U1.60 U1.61 U1.62 U1.63 U1.64 U1.65 U1.66 U1.67 U1.68 U1.69 U1.70 U1.71 U1.72 U1.73 U1.74 U1.75 U1.76 U1.77 U1.78 U1.79 U1.80 U1.81 U1.82 U1.83 U1.84 U1.85 U1.86 U1.87 U1.88 U2.1 U2.2 U2.3 U2.4 U2.5 U2.6 U2.7 U2.8 U2.9 U2.10 U2.11 U2.12 U2.13 U2.14 U2.15 U2.16 U2.17 U2.18 U2.19 U2.20 U2.21 U2.22 U2.23 U2.24 U2.25 U2.26 U2.27 U2.28 U2.29 U2.30 U2.31 U2.32 U2.33 U2.34 U2.35 U2.36 U2.37 U2.38 U2.39 U2.40 U2.41 U2.42 U2.43 U2.44 U2.45 U2.46 U2.47 U2.48 U2.49 U2.50 U2.51 U2.52 U2.53 U2.54 U2.55 U2.56 U2.57 U2.58 U2.59 U2.60 U2.61 U2.62 U2.63 U2.64 U2.65 U2.66 U2.67 U2.68 U2.69 U2.70 U2.71 U2.72 U2.73 U2.74 U2.75 U2.76 U2.77 U3.1 U3.2 U3.3 U3.4 U3.5 U3.6 U3.7 U3.8 U3.9 U3.10 U3.11 U3.12 U3.13 U3.14 U3.15 U3.16 U3.17 U3.18 U3.19 U3.20 U3.21 U3.22 U3.23 U3.24 U3.25 U3.26 U3.27 U3.28 U3.29 U3.30 U3.31 U3.32 U3.33 U3.34 U3.35 U3.36 U3.37 U3.38 U3.39 U3.40 U3.41 U3.42 U3.43 U3.44 U3.45 U3.46 U3.47 U3.48 U3.49 U3.50 U3.51 U3.52 U3.53 U3.54 U3.55 U3.56 U3.57 U3.58 U3.59 U3.60 U3.61 U3.62 U3.63 U3.64 U5.1 U5.2 U5.3 U5.4 U5.5 U5.6 U5.7 U5.8 U5.9 U5.10 U5.11 U5.12 U5.13 U5.14 U5.15 U5.16 U5.17 U5.18 U8.1 U8.2 U8.3 U8.4 U8.5 U9.1 U9.2 U9.3 U9.4 U9.5 U9.6 U10.1 U10.2 U10.3 U10.4 U10.5 U10.6 U10.7 U10.8 U10.9 U10.10 U10.11 U11.1 U11.2 U11.3 U11.4 U11.5 U11.6 U11.7 U11.8 U11.9 U12.1 U12.2 U12.3 U13.1 U13.2 U13.3 U13.4 U13.5 U13.6 U13.7 U13.8 U13.9 U13.10 U13.11 U13.12 U14.1 U14.2 U14.3 U14.4 U14.5 U14.6 U14.7 U14.8 U14.9 U14.10 U14.11 U14.12 U14.13 U14.14 U15.1 U15.2 U15.3 U15.4 U15.5 U15.6 U15.7 U15.8 U15.9 U15.10 U16.1 U16.2 U16.3 U16.4 U16.5 U16.6 U16.7 U16.8 U16.9 U16.10 U16.11 U16.12 U16.13 U16.14 U16.15 U16.16 U17.1 U17.2 U17.3 U17.4 U17.5 U17.6 U18.A1 U18.A2 U18.B1 U18.B2 U18.C1 U18.C2 U19.1 U19.2 U19.3 U19.4 U19.5 U19.6 Y1.1 Y1.2 Y1.3 Y2.1 Y2.2 Y2.3 Y2.4